# EAGLE board _Carolo_31012020 (EAGLE 7.7.0)
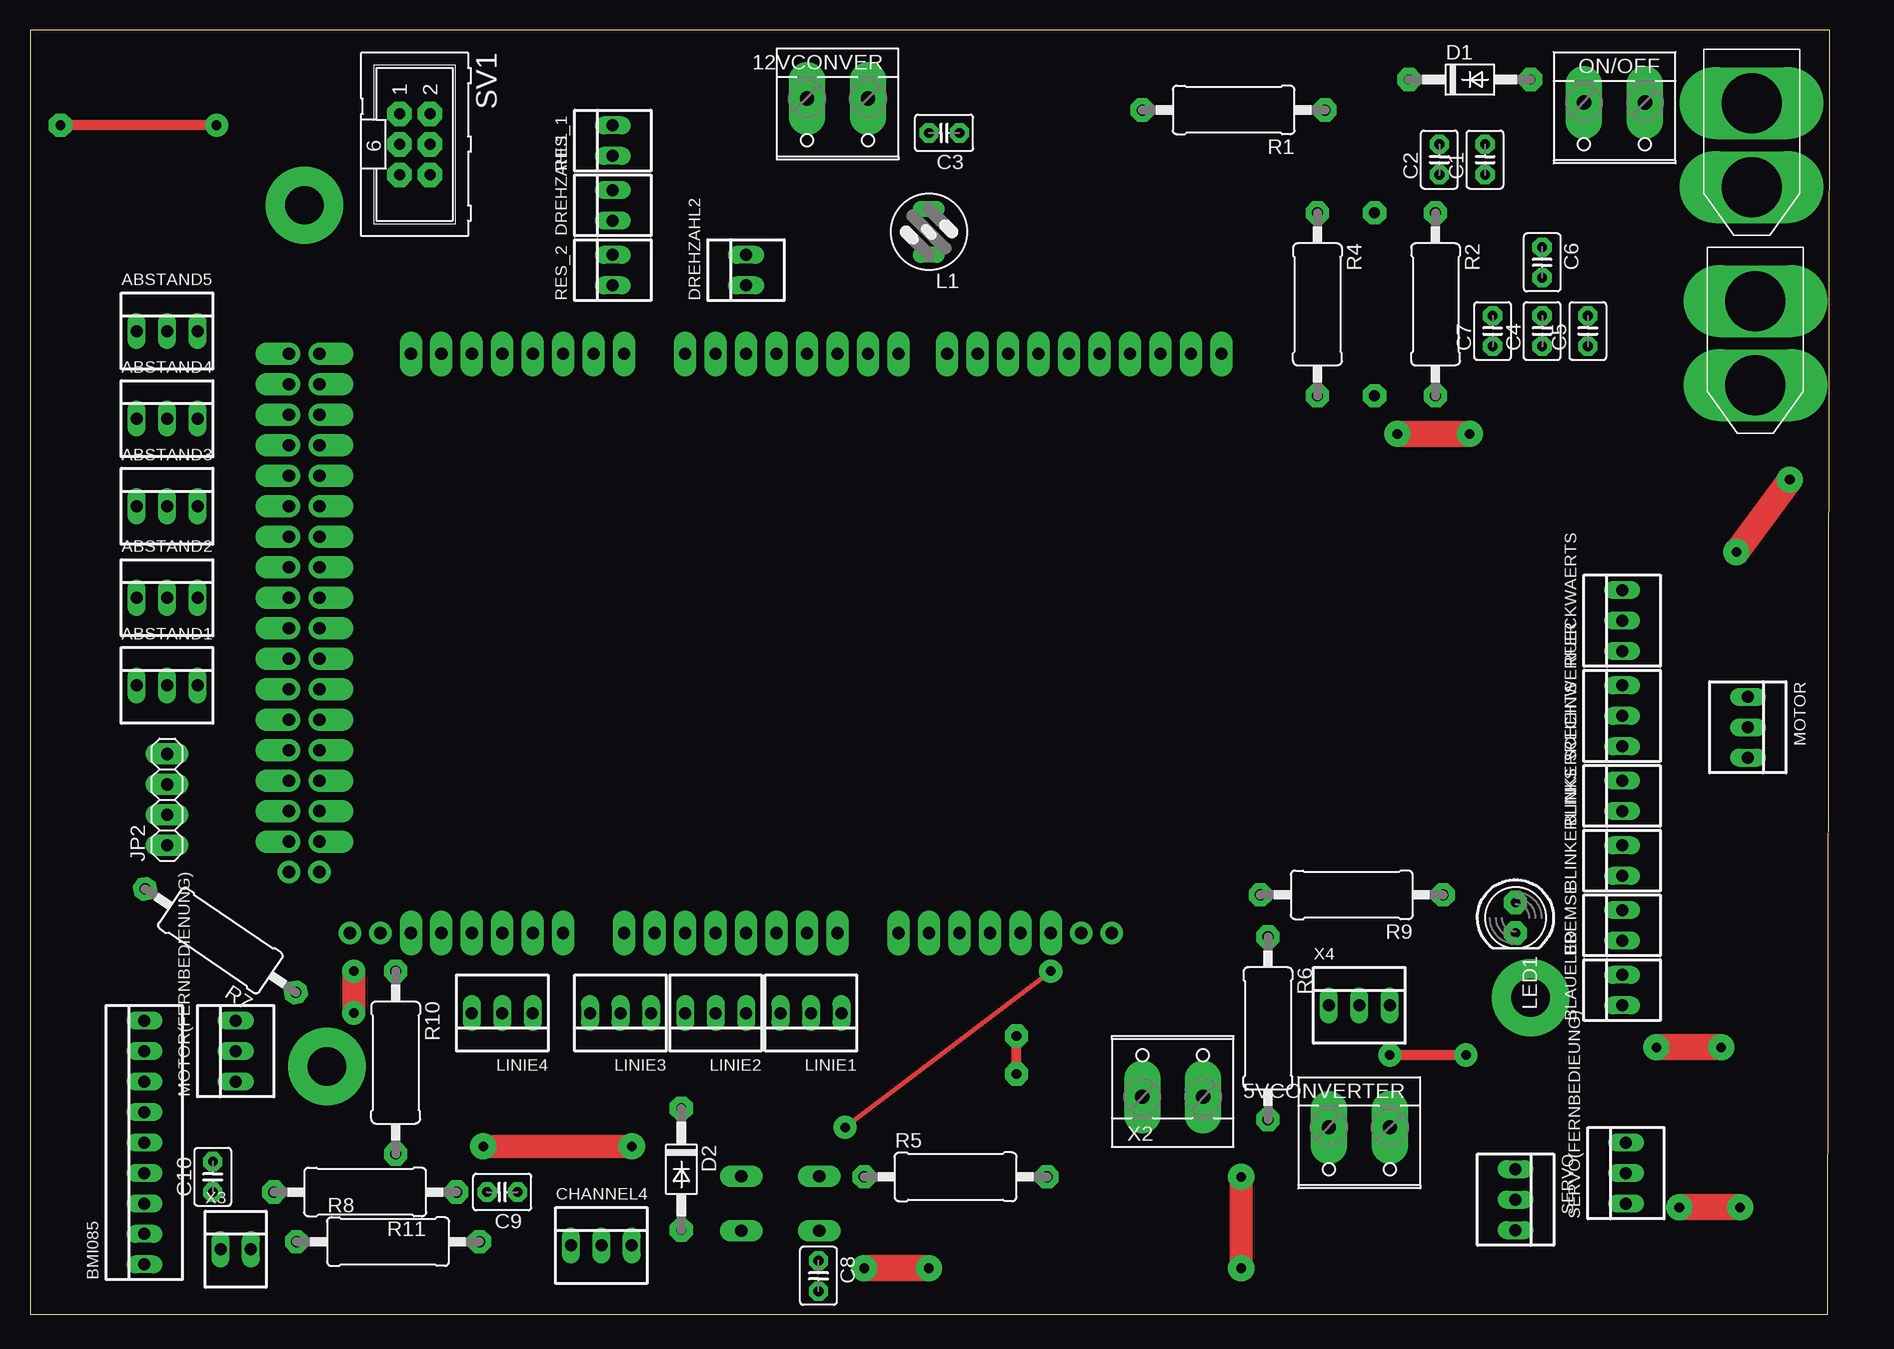
[diagram p0: board, top side]
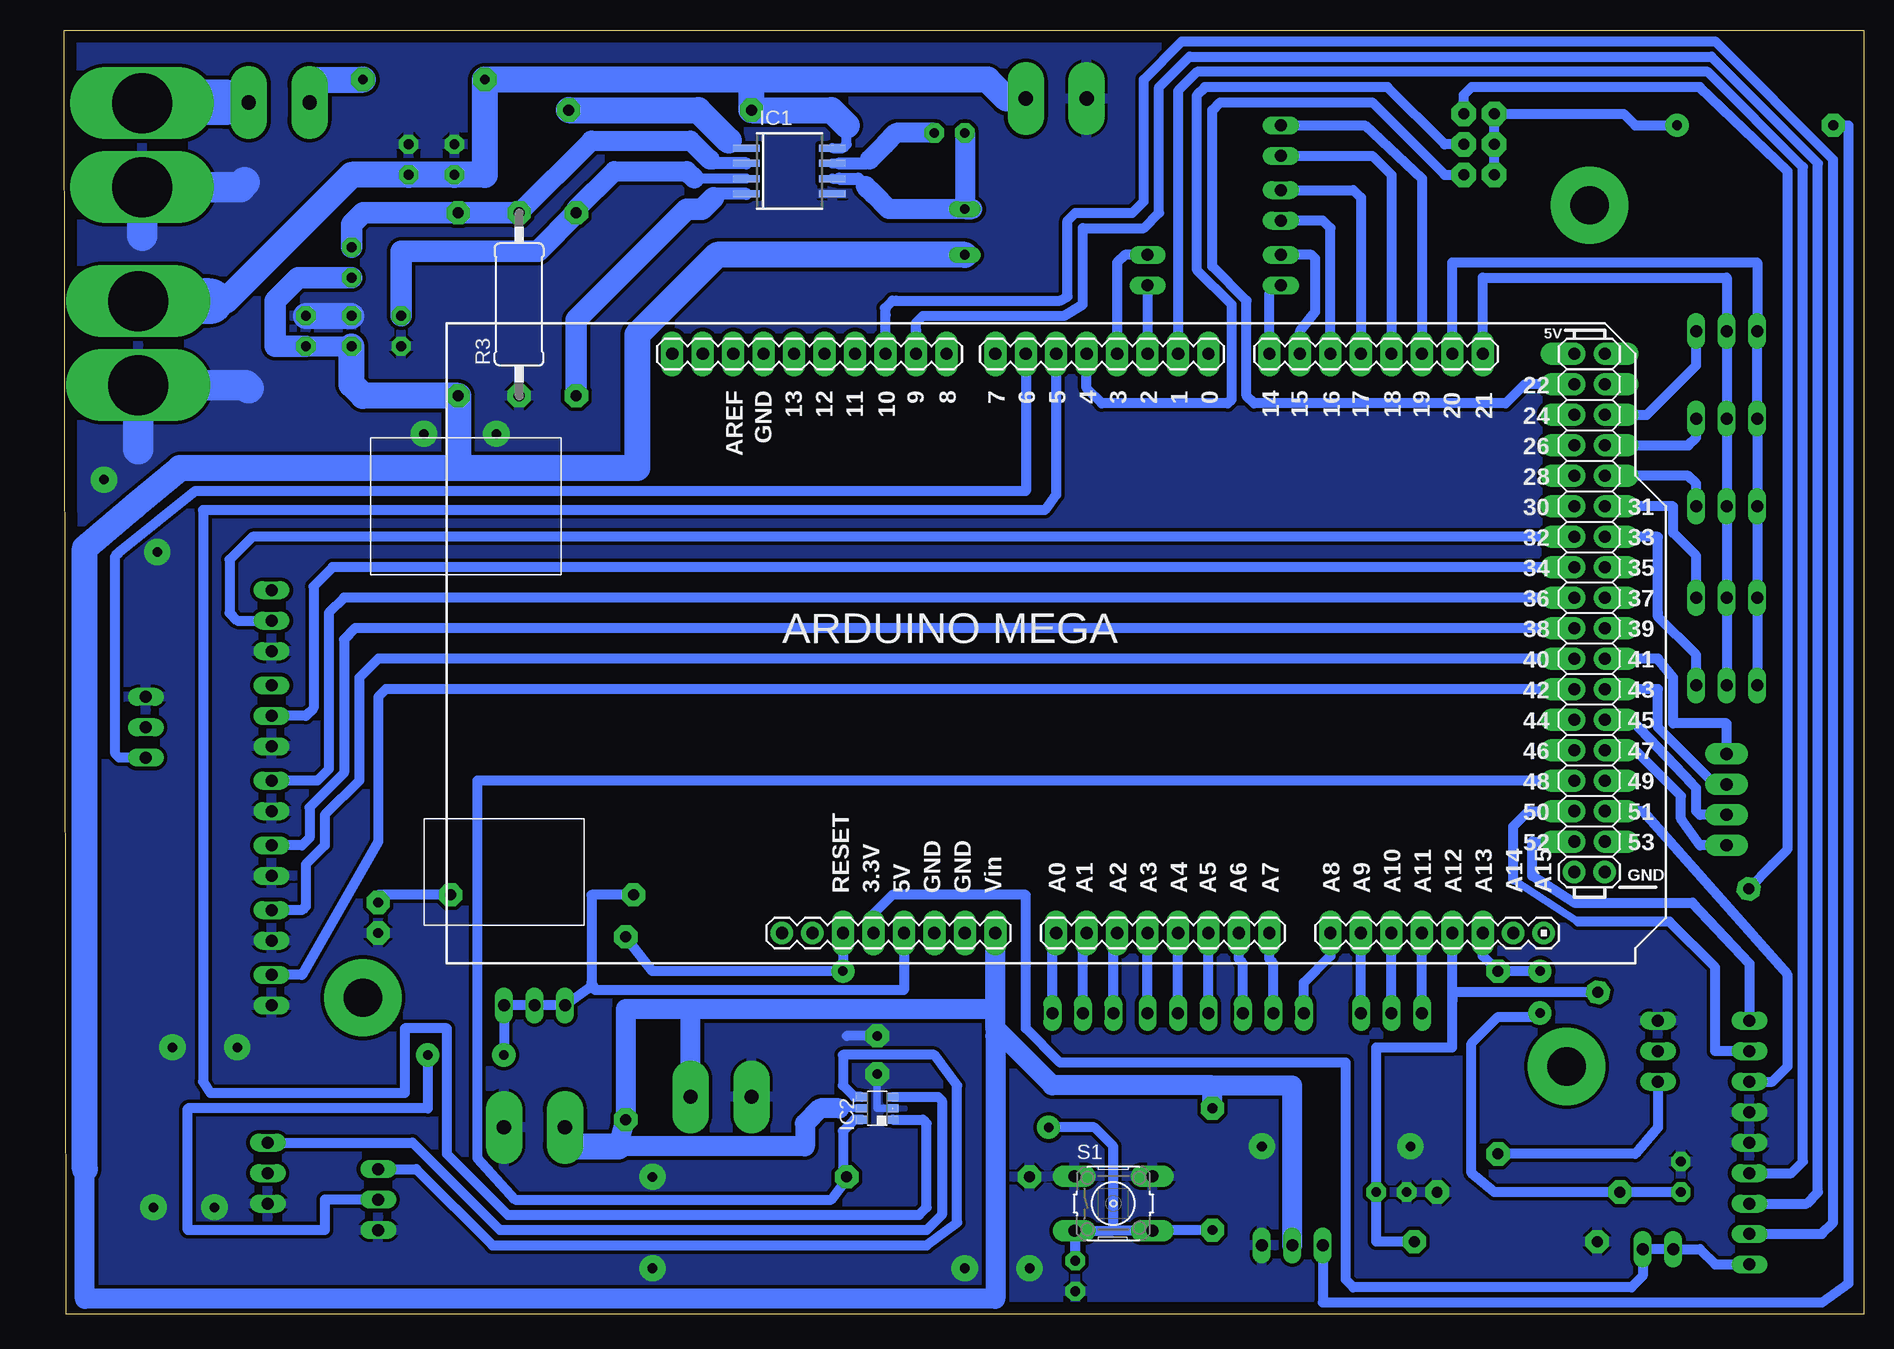
[diagram p1: board, bottom side, seen from below]

Size 150 x 107 mm. Coordinates in mm from the lower left corner, seen from the top.
Outline: 0,0 149.84,0 150,107 0,107 0,0
Copper layers (1*16): Top 0.035mm / dielectric 1.5mm / Bottom 0.035mm
Design rules "default": minimum track width 10mil, minimum drill 24mil, track to track 8mil, track to pad 8mil, pad to pad 8mil, via to via 8mil, smd to smd 8mil, copper to edge 40mil, drill to drill 8mil, minimum pad ring 10mil, minimum via ring 8mil, stop-mask expansion 4mil, vias tented up to drill 0mil, thermal gap 10mil

## Footprints (pad centres in the part's own frame; a part is rotated, then mirrored left to right if it is on the bottom)
W237-132 = drill 1.194 pad 3.048 long: 1 -2.54,-0.635; 2 2.54,-0.635
22-23-2031 = drill 1 long: 1 -2.54,0; 2 0,0; 3 2.54,0
22-23-2021 = drill 1 long: 1 -1.27,0; 2 1.27,0
22-23-2091 = drill 1 long: 1 -10.16,0; 2 -7.62,0; 3 -5.08,0; 4 -2.54,0; 5 0,0; 6 2.54,0; 7 5.08,0; 8 7.62,0; 9 10.16,0
C2.5-3 = drill 0.813 pad 1.6 octagon: 1 -1.27,0; 2 1.27,0
DO41-10 = drill 0.8 pad 1.93 octagon: A 5.08,0; C -5.08,0
ARDUINO_MEGA = drill 1.016 pad 1.88 long: 0 63.5,50.8; 1 60.96,50.8; 2 58.42,50.8; 3 55.88,50.8; 3.3V 35.56,2.54; 4 53.34,50.8; 5 50.8,50.8; 5V 38.1,2.54; 6 48.26,50.8; 7 45.72,50.8; 8 41.656,50.8; 9 39.116,50.8; 10 36.576,50.8; 11 34.036,50.8; 12 31.496,50.8; 13 28.956,50.8; 14 68.58,50.8; 15 71.12,50.8; 16 73.66,50.8; 17 76.2,50.8; 18 78.74,50.8; 19 81.28,50.8; 20 83.82,50.8; 21 86.36,50.8; A0 50.8,2.54; A1 53.34,2.54; A2 55.88,2.54; A3 58.42,2.54; A4 60.96,2.54; A5 63.5,2.54; A6 66.04,2.54; A7 68.58,2.54; A8 73.66,2.54; A9 76.2,2.54; A10 78.74,2.54; A11 81.28,2.54; A12 83.82,2.54; A13 86.36,2.54; AREF 23.876,50.8; GND 26.416,50.8; GND. 43.18,2.54; GND.. 40.64,2.54; RESET 33.02,2.54; SCL1 18.796,50.8; SDA1 21.336,50.8; VIN 45.72,2.54 | drill 1.016 pad 1.88 offset: 5V. 93.98,50.8; 5V.. 96.52,50.8; 22 93.98,48.26; 23 96.52,48.26; 24 93.98,45.72; 25 96.52,45.72; 26 93.98,43.18; 27 96.52,43.18; 28 93.98,40.64; 29 96.52,40.64; 30 93.98,38.1; 31 96.52,38.1; 32 93.98,35.56; 33 96.52,35.56; 34 93.98,33.02; 35 96.52,33.02; 36 93.98,30.48; 37 96.52,30.48; 38 93.98,27.94; 39 96.52,27.94; 40 93.98,25.4; 41 96.52,25.4; 42 93.98,22.86; 43 96.52,22.86; 44 93.98,20.32; 45 96.52,20.32; 46 93.98,17.78; 47 96.52,17.78; 48 93.98,15.24; 49 96.52,15.24; 50 93.98,12.7; 51 96.52,12.7; 52 93.98,10.16; 53 96.52,10.16 | drill 1.016 pad 1.88: A14 88.9,2.54; A15 91.44,2.54; GND... 93.98,7.62; GND.... 96.52,7.62; I/OREF 30.48,2.54; N/C 27.94,2.54
SOP-08 = smd 0.6 x 2.2: 1 -1.905,-3.6; 2 -0.635,-3.6; 3 0.635,-3.6; 4 1.905,-3.6; 5 1.905,3.575; 6 0.635,3.575; 7 -0.635,3.575; 8 -1.905,3.575
DBV_R-PDSO-G6 = smd 0.69 x 0.99: 1 -0.95,-1.29; 2 0,-1.29; 3 0.95,-1.29; 4 0.95,1.3; 5 0,1.3; 6 -0.95,1.3
1X04 = drill 1.016 pad 1.778 long: 1 -3.81,0; 2 -1.27,0; 3 1.27,0; 4 3.81,0
82114R = drill 0.813 long: 1 0,1.905; 2 0,-1.905
LED5MM = drill 0.813 pad 1.93 octagon: A -1.27,0; K 1.27,0
0411/15 = drill 0.914 pad 1.93 octagon: 1 -7.62,0; 2 7.62,0
B3F-10XX = drill 1.016 pad 1.778 long: 1 -3.251,2.261; 2 3.251,2.261; 3 -3.251,-2.261; 4 3.251,-2.261
ML6 = drill 0.914 pad 2.032 octagon: 1 -2.54,-1.27; 2 -2.54,1.27; 3 0,-1.27; 4 0,1.27; 5 2.54,-1.27; 6 2.54,1.27
XT60 = drill 5 long: + 4.5,0; - 11.5,0

## Placement (x,y rotation side)
5VCONVERTER  [W237-132]  110.81,14.92 180 top
12VCONVER  [W237-132]  67.31,100.65 180 top
ABSTAND1  22-23-2031  [22-23-2031]  11.43,52.39 0 top
ABSTAND2  22-23-2031  [22-23-2031]  11.43,59.69 0 top
ABSTAND3  22-23-2031  [22-23-2031]  11.43,67.31 0 top
ABSTAND4  22-23-2031  [22-23-2031]  11.43,74.61 0 top
ABSTAND5  22-23-2031  [22-23-2031]  11.43,81.92 0 top
BLAUELED  22-23-2021  [22-23-2021]  132.72,26.99 90 top
BLINKERLINKS  22-23-2021  [22-23-2021]  132.72,37.78 90 top
BLINKERRECHTS  22-23-2021  [22-23-2021]  132.72,43.18 90 top
BMI085  22-23-2091  [22-23-2091]  9.53,14.29 90 top
BREMSE  22-23-2021  [22-23-2021]  132.72,32.38 90 top
C1  10u  [C2.5-3]  121.28,96.2 90 top
C2  10u  [C2.5-3]  117.47,96.2 90 top
C3  470n  [C2.5-3]  76.2,98.42 180 top
C4  22u  [C2.5-3]  126.05,81.92 90 top
C5  22u  [C2.5-3]  129.86,81.92 90 top
C6  5p  [C2.5-3]  126.05,87.63 270 top
C7  470n  [C2.5-3]  121.92,81.92 90 top
C8  22u  [C2.5-3]  65.72,3.17 270 top
C9  1u  [C2.5-3]  39.37,10.16 180 top
C10  1u  [C2.5-3]  15.24,11.43 90 top
CHANNEL4  22-23-2031  [22-23-2031]  47.62,5.71 0 top
D1  1N4942  [DO41-10]  120.02,102.87 0 top
D2  1N4942  [DO41-10]  54.29,12.06 270 top
DREHZAHL1  22-23-2021  [22-23-2021]  48.58,92.39 90 top
DREHZAHL2  22-23-2021  [22-23-2021]  59.69,87 90 top
E$1  [ARDUINO_MEGA]  118.11,29.21 0 bottom
IC1  TPS77301  [SOP-08]  89.53,95.25 270 bottom
IC2  741G3157DBVR  [DBV_R-PDSO-G6]  82.23,17.14 90 bottom
JP2  [1X04]  11.43,42.86 90 top
L1  3,3uH  [82114R]  74.93,90.17 180 top
LED1  [LED5MM]  123.83,33.02 270 top
LINIE1  22-23-2031  [22-23-2031]  65.09,25.08 180 top
LINIE2  22-23-2031  [22-23-2031]  57.15,25.08 180 top
LINIE3  22-23-2031  [22-23-2031]  49.21,25.08 180 top
LINIE4  22-23-2031  [22-23-2031]  39.37,25.08 180 top
MOTOR  22-23-2031  [22-23-2031]  143.19,48.9 270 top
MOTOR(FERNBEDIENUNG)  22-23-2031  [22-23-2031]  17.14,21.91 90 top
ON/OFF  [W237-132]  132.08,100.33 180 top
R1  10k  [0411/15]  100.33,100.33 180 top
R2  365k  [0411/15]  117.16,84.14 270 top
R3  49,9k  [0411/15]  112.08,84.14 90 bottom
R4  100k  [0411/15]  107.31,84.14 270 top
R5  10k  [0411/15]  77.15,11.43 0 top
R6  10k  [0411/15]  103.19,23.81 270 top
R7  150k  [0411/15]  15.88,31.11 145.6 top
R8  1M  [0411/15]  29.84,6.03 0 top
R9  330  [0411/15]  110.17,34.92 180 top
R10  150k  [0411/15]  30.48,20.95 270 top
R11  1M  [0411/15]  27.94,10.16 180 top
RES_1  22-23-2021  [22-23-2021]  48.58,97.79 90 top
RES_2  22-23-2021  [22-23-2021]  48.58,87 90 top
RUECKWAERTS  22-23-2031  [22-23-2031]  132.72,57.78 90 top
S1  [B3F-10XX]  62.55,9.21 0 bottom
SCHEINWERFER  22-23-2031  [22-23-2031]  132.72,49.85 90 top
SERVO  22-23-2031  [22-23-2031]  123.83,9.53 270 top
SERVO(FERNBEDIEUNG)  22-23-2031  [22-23-2031]  133.03,11.75 90 top
SV1  [ML6]  32.07,97.47 270 top
U$1  XT60  [XT60]  143.51,105.41 270 top
U$2  XT60  [XT60]  143.83,88.9 270 top
X2  [W237-132]  95.25,18.73 0 top
X3  22-23-2021  [22-23-2021]  17.14,5.4 0 top
X4  22-23-2031  [22-23-2031]  110.81,25.72 0 top

## Library data of the parts
5VCONVERTER 12VCONVER ON/OFF X2 = con-wago-508; OC_FARNELL: unknown; OC_NEWARK: unknown
ABSTAND1-ABSTAND5 CHANNEL4 LINIE1-LINIE4 MOTOR MOTOR(FERNBEDIENUNG) RUECKWAERTS SCHEINWERFER SERVO SERVO(FERNBEDIEUNG) X4 = con-molex; MF: MOLEX; MPN: 22-23-2031; OC_FARNELL: 1462950; OC_NEWARK: 30C0862
BLAUELED BLINKERLINKS BLINKERRECHTS BREMSE DREHZAHL1 DREHZAHL2 RES_1 RES_2 X3 = con-molex; MF: MOLEX; MPN: 22-23-2021; OC_FARNELL: 1462926; OC_NEWARK: 25C3832
BMI085 = con-molex; MF: MOLEX; MPN: 22-23-2091; OC_FARNELL: 1756827; OC_NEWARK: 56H0450
C1-C10 = capacitor-wima
D1 D2 = diode
E$1 = Arduino
IC1 = texas; MF: TEXAS INSTRUMENT CONNECTORS; MPN: TPS77301DGK; OC_FARNELL: 1510194; OC_NEWARK: 77C1213
IC2 = 74xx-little-us
JP2 = pinhead
L1 = inductors
LED1 = led
R1-R11 = resistor
S1 = switch-omron; MPN: B3F-1000; OC_FARNELL: 176432; OC_NEWARK: 36M3542
SV1 = con-harting-ml; OC_FARNELL: unknown; OC_NEWARK: unknown
U$1 U$2 = XT60

## Nets
3,3V: BMI085.1 X3.1 X3.2
5V_BUCK: 5VCONVERTER.2 C4.1 C5.1 C6.2 CHANNEL4.2 D2.C IC2.5 L1.1 R2.2 R6.2 X2.2
5VARDUINO: R9.2 SERVO.2 X4.1 X4.2 X4.3
A0: LINIE1.1
A1: LINIE1.2
A2: LINIE1.3
A3: LINIE2.1
A4: LINIE2.2
A5: LINIE2.3
A6: LINIE3.1
A7: LINIE3.2
A8: LINIE3.3
A9: LINIE4.1
A10: LINIE4.2
A11: LINIE4.3
ARDUINO_PWM_SERVO: IC2.1
EINGANG_MUX_SERVO: IC2.3 SERVO(FERNBEDIEUNG).3
GND: 5VCONVERTER.1 12VCONVER.2 BLAUELED.1 BLINKERLINKS.1 BLINKERRECHTS.1 BMI085.5 BMI085.6 BREMSE.1 C1.2 C2.2 C4.2 C5.2 C7.1 C8.2 C9.2 C10.2 CHANNEL4.3 IC1.5 IC2.2 LED1.K MOTOR(FERNBEDIENUNG).3 MOTOR.1 R3.1 R5.1 R8.1 R11.1 RUECKWAERTS.1 S1.1 S1.2 SCHEINWERFER.1 SERVO(FERNBEDIEUNG).1 SERVO.3 U$1.- U$2.- X2.1
MISO: BMI085.8 E$1.50
MOSI: BMI085.7
N$1: ON/OFF.1 U$1.+
N$2: IC2.4 SERVO.1
N$4: R7.2 SV1.2
N$5: C6.1 IC1.2 R2.1 R3.2
N$6: C3.1 IC1.7
N$8: CHANNEL4.1 SV1.1 SV1.3 SV1.5
N$9: RUECKWAERTS.2
N$10: C3.2 IC1.6 L1.2
N$12: C7.2 IC1.3 R4.1
N$14: SCHEINWERFER.2
N$15: BLINKERRECHTS.2
N$16: BLINKERLINKS.2
N$17: LED1.A R9.1
N$18: BLAUELED.2
N$19: BREMSE.2
N$20: JP2.4
N$23: IC1.4 R4.2
N$24: D1.A ON/OFF.2
N$26: JP2.3
N$27: 12VCONVER.1 C1.1 C2.1 D1.C IC1.8 R1.2 U$2.+
N$28: MOTOR(FERNBEDIENUNG).1 R10.2
N$29: E$1.45 JP2.2
N$30: E$1.47 JP2.1
N$32: IC1.1 R1.1
PIN1: BMI085.4
PIN2: DREHZAHL2.1
PIN3: DREHZAHL2.2
PIN9: BMI085.3
PIN10: BMI085.2
PIN18: DREHZAHL1.1 E$1.16
PIN19: DREHZAHL1.2 E$1.17
PIN25: ABSTAND5.3
PIN27: ABSTAND4.3
PIN29: ABSTAND3.3
PIN31: ABSTAND2.3
PIN33: ABSTAND1.3
PIN_TIEFPASS_CHANNEL4: C9.1 R7.1 R8.2
PWM_MOTOR: MOTOR.3
RESET: C8.1 D2.A R6.1 S1.3 S1.4
S$1: E$1.19 RES_1.2
S$2: E$1.18 RES_1.1
S$3: E$1.15 RES_2.2
S$4: E$1.14 RES_2.1
SCK: BMI085.9
SCL: ABSTAND1.2 ABSTAND2.2 ABSTAND3.2 ABSTAND4.2 ABSTAND5.2
SDA: ABSTAND1.1 ABSTAND2.1 ABSTAND3.1 ABSTAND4.1 ABSTAND5.1
SELECT_MUX: IC2.6 R5.2
TIEFPASS_DIGITAL_CHANNEL4: SV1.6
TIEFPASS_MOTOR: C10.1 R10.1 R11.2
TIEFPASS_PWM_CHANNEL4: SV1.4

## Tracks (layer width: path | path; a pad name or v marks a point on that pad's centre or on a via)
3,3V
  Bottom 0.813: 82.55,31.75 82.55,33.34 80.96,34.92 69.85,34.92 69.85,23.81 66.99,20.95 43.18,20.95 43.18,2.86 42.55,2.22 19.37,2.22 18.41,3.17 X3.2 X3.1 13.65,5.4 12.38,4.13 BMI085.1
5V_BUCK
  Bottom 0.61: IC2.5 85.41,17.14
  Bottom 0.813: 72.71,25.4 72.71,23.5 72.39,23.18
  Bottom 1.676: 72.71,25.4 97.79,25.4 | 97.79,25.4 103.19,25.4 R6.2 103.82,13.97 88.27,13.97 88.27,15.88 87,17.14 85.41,17.14 | 54.29,19.05 67.63,19.05 72.39,23.81 | C5.1 C4.1 | 72.39,23.81 72.39,31.75 | D2.C 54.29,19.05 | 72.39,23.81 72.39,23.18 72.39,1.27 148.27,1.27 148.27,12.06 | X2.2 97.79,25.4 | 54.29,19.05 47.62,19.05 CHANNEL4.2
  Bottom 1.778: C5.1 132.4,80.64 132.4,84.45 130.49,86.36 C6.2
  Bottom 2.184: 148.27,12.06 148.27,63.82 144.15,67.31 140.34,70.48 117.16,70.48 | L1.1 95.57,88.27 102.23,81.6 102.23,70.48 117.16,70.48 | 117.16,70.48 R2.2 125.09,76.52 126.05,77.47 C4.1 | 5VCONVERTER.2 108.27,13.97 103.82,13.97
5VARDUINO  (via drill 0.8 pad 1.93)
  Top 0.813: v113.35,21.59 v119.7,21.59
  Bottom 0.813: 80.01,31.75 80.01,26.99 105.73,26.99 | 105.73,26.99 106.05,27.3 X4.1 X4.2 X4.3 v113.35,21.59 | v119.7,21.59 119.7,17.14 139.7,17.14 139.7,6.99 128.27,6.99 128.27,9.53 SERVO.2 | R9.2 106.05,34.92 106.05,27.62 105.73,26.99
A0
  Bottom 0.813: LINIE1.1 67.63,31.43 67.31,31.75
A1
  Bottom 0.813: LINIE1.2 65.09,31.43 64.77,31.75
A2
  Bottom 0.813: LINIE1.3 62.55,31.43 62.23,31.75
A3
  Bottom 0.813: LINIE2.1 59.69,31.75
A4
  Bottom 0.813: LINIE2.2 57.15,31.75
A5
  Bottom 0.813: LINIE2.3 54.61,31.75
A6
  Bottom 0.813: LINIE3.1 51.75,29.21 52.07,29.53 52.07,31.75
A7
  Bottom 0.813: LINIE3.2 49.21,29.21 49.53,29.53 49.53,31.75
A8
  Bottom 0.813: LINIE3.3 46.67,27.62 44.45,29.84 44.45,31.75
A9
  Bottom 0.813: LINIE4.1 41.91,31.75
A10
  Bottom 0.813: LINIE4.2 39.37,31.75
A11
  Bottom 0.813: LINIE4.3 36.83,31.75
ARDUINO_PWM_SERVO
  Bottom 0.813: 67.31,80.01 67.31,68.26 68.26,66.99 138.43,66.99 138.43,19.37 137.79,18.41 121.6,18.41 121.6,23.81 118.11,23.81 118.11,13.34 113.03,8.26 78.74,8.26 78.11,8.89 78.11,15.88 78.42,16.2 IC2.1
EINGANG_MUX_SERVO
  Bottom 0.813: IC2.3 77.15,18.09 76.83,17.78 76.83,8.26 78.11,6.99 113.67,6.99 120.97,14.29 SERVO(FERNBEDIEUNG).3
GND  (via drill 0.8 pad 1.93, 0.8 pad 2.18)
  Top 0.813: v82.23,20 v82.23,23.18
  Top 1.93: v100.97,3.81 v100.97,11.43 | v37.78,13.97 v50.16,13.97
  Top 2.184: v113.98,73.34 v120.02,73.34 | v146.69,69.53 v142.24,63.5 | v142.56,8.89 v137.48,8.89 | v140.97,22.23 v135.57,22.23 | v74.93,3.81 v69.53,3.81
  Bottom 0.61: IC2.2 82.23,17.14 v82.23,20
  Bottom 0.813: v82.23,23.18 84.77,23.18
  Bottom 2.184: C5.2 C4.2
  Bottom 2.54: 134.94,94.3 135.32,93.91 U$1.- 143.51,89.85 | 134.62,77.15 134.87,77.4 U$2.- 143.83,72.07
  pour Bottom (isolate 0.305): -2.54,109.86 153.03,109.86 153.03,-3.81 -2.54,-3.81
MISO
  Bottom 0.61: 23.81,32.7 29.21,36.2
  Bottom 0.813: BMI085.8 12.38,21.91 12.38,28.89 16.19,32.7 23.81,32.7 | 29.21,36.2 29.21,40.64 27.94,41.91 E$1.50
MOSI
  Bottom 0.813: BMI085.7 7.62,19.37 6.35,20.64 6.35,28.26 18.41,41.91 20,41.91 21.59,41.91
N$1
  Bottom 2.54: ON/OFF.1 136.53,100.97
  Bottom 3.81: 136.53,100.97 143.46,100.97 U$1.+
N$2
  Bottom 0.813: IC2.4 84.14,18.09 85.09,19.05 85.09,21.59 77.47,21.59 75.56,19.05 75.56,7.62 78.11,5.71 114.3,5.71 120.65,12.06 SERVO.1
N$4
  Bottom 0.813: R7.2 7.63,37.46 6.35,38.73 6.35,95.25 13.65,102.23 32.7,102.23 33.34,101.6 SV1.2
N$5
  Bottom 1.016: IC1.2 95.89,95.89 96.2,96.2
  Bottom 1.676: R3.2 106.05,97.79 97.79,97.79 96.2,96.2
  Bottom 1.778: C6.1 126.05,90.81 125.09,91.76 R2.1 R3.2
N$6
  Bottom 0.813: IC1.7 85.41,95.89
  Bottom 1.016: 85.41,95.89 83.19,95.89 81.6,97.47
  Bottom 1.676: C3.1 80.64,98.42 81.6,97.47 82.87,96.2
N$8  (via drill 0.8 pad 1.93)
  Top 0.813: v15.56,99.06 v2.54,99.06
  Bottom 0.813: v15.56,99.06 19.05,99.06 20,100.01 SV1.1 SV1.3 SV1.5 | v2.54,99.06 1.27,99.06 1.27,2.54 3.49,0.95 45.09,0.95 CHANNEL4.1
N$9
  Bottom 0.813: 24.13,64.77 134.3,64.77 136.21,62.87 136.21,58.42 135.57,57.78 RUECKWAERTS.2
N$10
  Bottom 0.813: IC1.6 85.41,94.61
  Bottom 1.016: 85.41,94.61 83.82,94.61 82.55,93.34
  Bottom 1.676: C3.2 L1.2 | L1.2 74.3,92.08 | L1.2 81.28,92.08 82.55,93.34 83.19,93.98
N$12
  Bottom 0.813: IC1.3 97.47,94.61
  Bottom 1.676: R4.1 107.31,92.08 104.14,95.25 98.11,95.25 97.47,94.61
  Bottom 1.778: C7.2 121.92,88.58 110.49,88.58 R4.1
N$14
  Bottom 0.813: 24.13,62.23 127.64,62.23 129.22,60.64 129.22,50.48 129.86,49.85 SCHEINWERFER.2
N$15
  Bottom 0.813: 24.13,59.69 126.68,59.69 127.95,58.42 127.95,45.4 128.91,44.45 BLINKERRECHTS.2
N$16
  Bottom 0.813: 24.13,57.15 125.73,57.15 126.68,56.2 126.68,45.09 129.54,42.23 129.54,39.69 130.18,39.05 BLINKERLINKS.2
N$17
  Bottom 0.813: R9.1 123.83,34.92 LED1.A
N$18
  Bottom 0.813: 24.13,52.07 123.19,52.07 123.83,51.44 123.83,39.37 130.18,28.26 BLAUELED.2
N$19
  Bottom 0.813: BREMSE.2 130.18,33.66 129.86,33.97 129.86,37.47 128.27,39.05 128.27,41.59 125.41,44.45 125.41,53.02 123.83,54.61 24.13,54.61
N$20
  Bottom 0.813: JP2.4 11.43,49.21 15.88,49.21 15.88,53.02 17.14,54.61 21.59,54.61
N$23
  Bottom 1.016: IC1.4 95.57,93.34 95.89,93.03
  Bottom 1.778: R4.2 107.31,82.87 98.11,92.08 96.84,92.08 95.89,93.03
N$24
  Bottom 2.184: ON/OFF.2 129.54,102.87 D1.A
N$25  (via drill 3.2 pad 6.45)
  other vias: 125.09,26.35
N$26
  Bottom 0.813: JP2.3 12.7,44.45 17.14,48.9 17.14,52.07 21.59,52.07
N$27
  Bottom 0.813: IC1.8 85.09,97.16 84.77,97.47 84.77,99.06 84.77,99.38
  Bottom 2.184: 92.71,102.87 R1.2 86.04,100.33 84.77,99.06 | 92.71,102.87 93.34,102.87 D1.C 114.94,94.93 C2.1 C1.1 126.05,94.93 136.53,84.45 138.11,84.45 | 12VCONVER.1 71.44,101.28 73.03,102.87 92.71,102.87
  Bottom 3.81: U$2.+ 137.85,84.4 138.11,84.45
N$28
  Bottom 0.813: MOTOR(FERNBEDIENUNG).1 17.14,15.56 19.05,13.34 R10.2
N$29
  Bottom 0.813: JP2.2 13.65,41.59 13.97,41.91 13.97,43.81 14.29,44.13 19.37,49.53 E$1.45
N$30
  Bottom 0.813: JP2.1 13.65,39.05 15.24,41.27 15.24,43.18 19.05,46.99 E$1.47
N$32
  Bottom 0.61: IC1.1 94.61,97.16
  Bottom 0.813: 94.61,97.16 94.61,97.79
  Bottom 2.184: R1.1 97.16,100.33 94.61,97.79
N$39  (via drill 3.2 pad 6.45)
  other vias: 22.86,92.39
N$40  (via drill 3.2 pad 6.45)
  other vias: 24.77,20.64
PIN1
  Bottom 0.813: 57.15,80.01 57.15,101.92 55.56,103.5 13.02,103.5 5.08,95.57 5.08,12.7 6.03,11.75 BMI085.4
PIN2
  Bottom 0.813: DREHZAHL2.1 59.69,80.01
PIN3
  Bottom 0.813: DREHZAHL2.2 61.59,88.27 62.23,87.63 62.23,80.01
PIN9
  Bottom 0.813: BMI085.3 4.76,9.21 3.81,10.16 3.81,95.89 12.7,104.78 56.2,104.78 58.74,102.23 58.74,91.76 60.01,90.49 65.09,90.49 65.09,84.14 66.67,83.19 78.42,83.19 78.74,82.87 78.99,82.61 78.99,81.98 78.99,80.01
PIN10
  Bottom 0.813: BMI085.2 3.49,6.67 2.54,7.62 2.54,96.2 12.38,106.05 56.83,106.05 60.01,102.87 60.01,92.71 60.96,91.76 65.72,91.76 66.36,91.12 66.36,84.77 66.99,84.45 80.64,84.45 80.96,84.45 81.6,83.82 81.53,83.76 81.53,83.25 81.53,80.01
PIN18
  Bottom 0.813: E$1.16 44.45,90.49 45.09,91.12 DREHZAHL1.1
PIN19
  Bottom 0.813: DREHZAHL1.2 42.55,93.66 41.91,93.03 E$1.17
PIN25
  Bottom 0.813: 21.59,74.93 18.1,74.93 16.83,76.2 13.97,79.06 ABSTAND5.3
PIN27
  Bottom 0.813: 21.59,72.39 14.61,72.39 13.97,73.03 ABSTAND4.3
PIN29
  Bottom 0.813: ABSTAND3.3 13.97,69.22 14.61,69.85 21.59,69.85
PIN31
  Bottom 0.813: ABSTAND2.3 13.97,63.18 15.88,65.09 15.88,66.36 15.88,67.31 21.59,67.31
PIN33
  Bottom 0.813: ABSTAND1.3 13.97,54.93 17.14,58.1 17.14,58.42 17.14,64.77 21.59,64.77
PIN_TIEFPASS_CHANNEL4
  Bottom 0.813: 34.29,26.04 34.29,22.23 40.64,22.23 C9.1 40.64,6.03 R8.2 | 34.29,26.04 34.29,31.75 | R7.1 34.28,26.81 34.29,26.04
PWM_MOTOR
  Bottom 0.813: 69.85,80.01 69.85,68.58 139.06,68.58 145.41,63.5 145.73,63.18 145.73,46.67 145.41,46.35 MOTOR.3
RESET  (via drill 0.8 pad 1.93)
  Top 0.406: v67.94,15.56 v85.09,28.57
  Bottom 0.813: 85.09,31.75 v85.09,28.57 100.97,28.57 R6.1 | 62.55,6.99 62.55,13.97 64.14,15.56 v67.94,15.56 | D2.A 59.26,6.99 S1.4 62.51,6.95 62.55,6.99 | 62.55,6.99 62.59,6.95 S1.3 65.72,6.87 C8.1
S$1
  Bottom 0.813: RES_1.2 41.59,99.06 36.83,94.61 E$1.19
S$2
  Bottom 0.813: RES_1.1 40.96,96.52 39.37,94.93 E$1.18
S$3
  Bottom 0.813: E$1.15 46.99,81.92 45.72,83.5 45.72,87.95 46.04,88.27 RES_2.2
S$4
  Bottom 0.813: E$1.14 49.53,85.09 48.9,85.72 RES_2.1
SCK
  Bottom 0.813: 24.13,39.37 27.62,39.37 27.62,36.51 24.13,34.29 14.29,34.29 9.53,29.21 BMI085.9
SCL
  Bottom 0.813: ABSTAND1.2 ABSTAND2.2 ABSTAND3.2 ABSTAND4.2 ABSTAND5.2 11.43,86.36 31.75,86.36 31.75,80.01
SDA
  Bottom 0.813: ABSTAND1.1 ABSTAND2.1 ABSTAND3.1 ABSTAND4.1 ABSTAND5.1 8.89,87.63 34.29,87.63 34.29,80.01
SELECT_MUX
  Bottom 0.813: 24.13,44.45 115.57,44.45 115.57,13.02 112.39,9.53 86.04,9.53 85.09,10.79 85.09,11.43 | IC2.6 84.14,16.2 85.09,15.24 85.09,11.43 | R5.2 85.09,11.43
TIEFPASS_DIGITAL_CHANNEL4
  Bottom 0.813: 24.13,77.47 28.26,77.47 29.84,75.88 50.8,75.88 51.44,76.52 51.44,84.45 54.29,87.31 54.29,100.33 53.66,100.97 40.96,100.97 34.92,94.93 SV1.6
TIEFPASS_MOTOR  (via drill 0.8 pad 1.93)
  Top 1.93: v26.99,28.57 v26.99,25.08
  Bottom 0.813: C10.1 R11.2 30.8,10.16 32.7,11.75 32.7,22.54 30.48,24.77 27.3,24.77 v26.99,25.08 | 31.75,31.75 31.75,29.84 R10.1 v26.99,28.57
TIEFPASS_PWM_CHANNEL4
  Bottom 0.813: 64.77,80.01 64.77,77.15 63.5,75.88 53.02,75.88 52.7,76.2 52.7,84.14 55.56,87 55.56,101.6 54.93,102.23 39.69,102.23 34.92,97.47 SV1.4